# Altium PCB ePBR20_HVB_rev0.PcbDoc
Units mil, origin at the board's own origin, x right, y up, seen from the top; angles counter-clockwise.
Board outline 2520 x 5770 mil, 2 copper layers (Top Layer, Bottom Layer); 37 components, 30 nets, 107 pads, 104 vias.
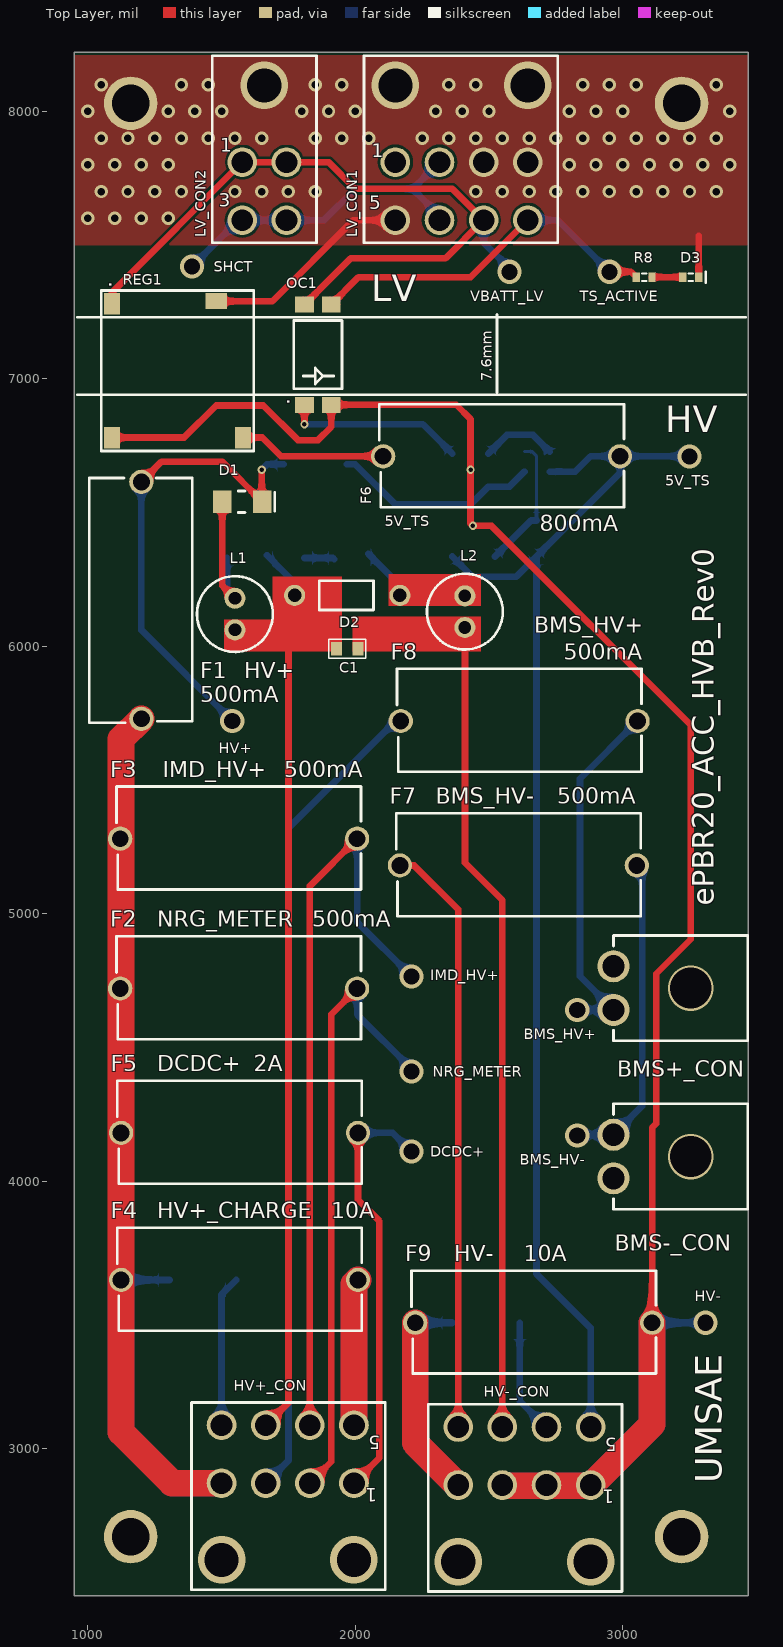
[diagram p0: Top Layer view]
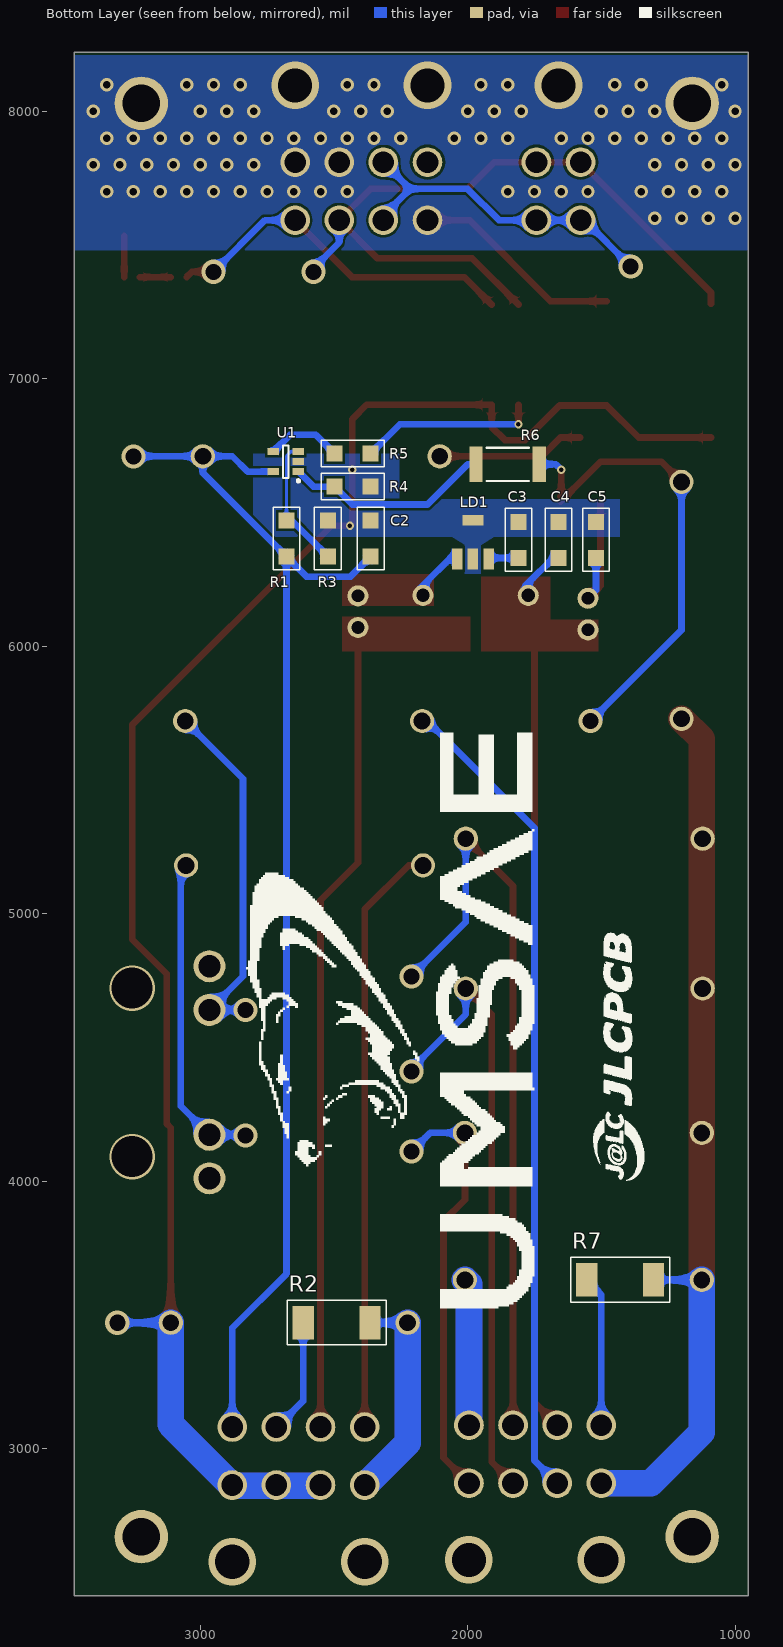
[diagram p1: Bottom Layer view, seen from below]
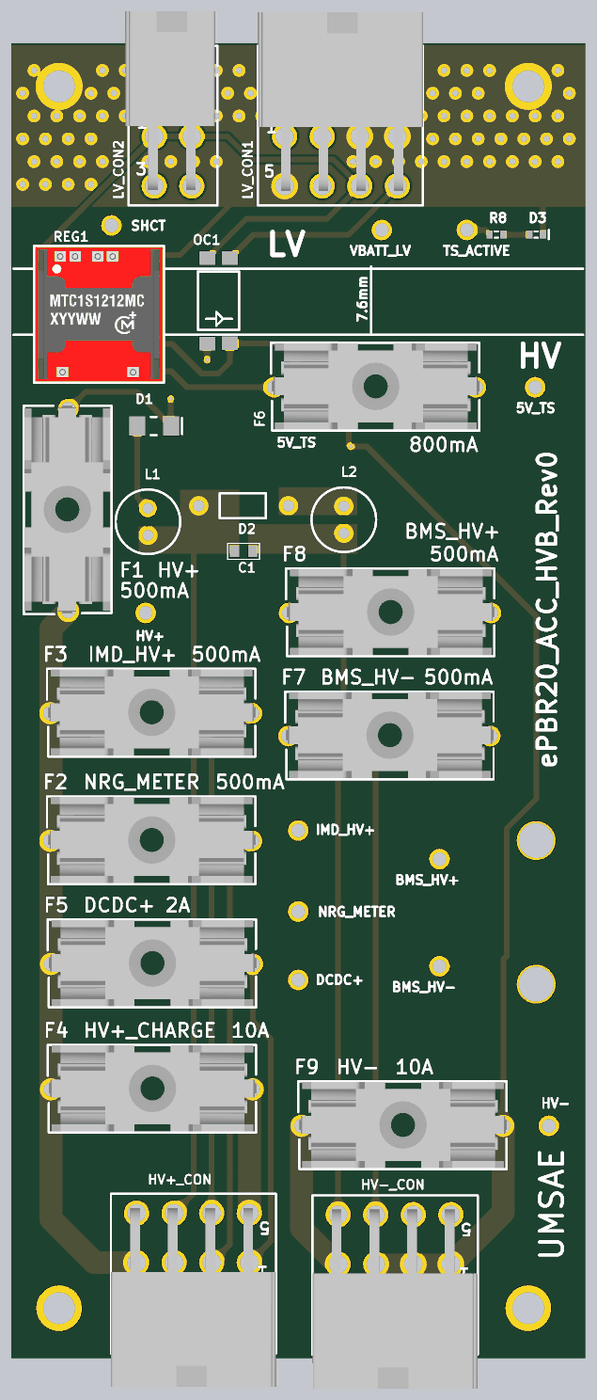
[diagram p2: 3D render of the assembled board from above, using the file's embedded part models]

## Layer stack, top to bottom
Top Solder: solder mask 0.4, Solder Resist, Dk 3.5
Top Layer: signal copper 1.4
Dielectric 1: dielectric 12.6, FR-4, Dk 4.8
Bottom Layer: signal copper 1.4
Bottom Solder: solder mask 0.4, Solder Resist, Dk 3.5

## Board outline
950,2450 3470,2450 3470,8220 950,8220

## Design rules (kind name [scope] priority, off if disabled: settings)
Clearance [All] p1: gap=10 ignorepadtopadclearanceinfootprint=FALSE
HoleSize [All] p1: absolutevalues=TRUE maxlimit=200 minlimit=15 maxpercent=80.000 minpercent=20.000
HoleToHoleClearance [All] p1: gap=8 allowstackedmicrovias=TRUE
MinimumAnnularRing MinimumAnnularRing_Pad [IsPad] p1: minimumring=7
MinimumAnnularRing MinimumAnnularRing_Via [IsVia] p2: minimumring=5
MinimumSolderMaskSliver [All] p1: minsoldermaskwidth=4
PlaneClearance [All] p1: clearance=15
PlaneConnect PlaneConnect_12V [InNet('12V')] p1: planeconnectstyle=Direct reliefexpansion=20 reliefentries=4 reliefconductorwidth=20 reliefairgap=10
PlaneConnect PlaneConnect_1 [All] p2: planeconnectstyle=Relief reliefexpansion=15 reliefentries=4 reliefconductorwidth=15 reliefairgap=10
PolygonConnect [All] p1: connectstyle=Direct reliefconductorwidth=15 reliefentries=4 polygonreliefangle="90 Angle" airgapwidth=10
RoutingVias [All] p1: holewidth=17 width=31 viastyle="Through Hole" minholewidth=15 minwidth=29 maxholewidth=50 maxwidth=100
SilkToSilkClearance [All] p1: silktosilkclearance=7
SilkToSolderMaskClearance [IsPad] p1: minsilkscreentomaskgap=2 clearancetoexposedcopper=TRUE
SolderMaskExpansion [All] p1: expansion=3
Width [All] p1: maxlimit=200 minlimit=7 preferedwidth=15
23 further rules are at their usual default settings.

## Classes and differential pairs
component class Connectors: BMS+_CON BMS-_CON HV+_CON HV+_CON1 HV-_CON HV-_CON1 LV_CON1 LV_CON2 SW1
component class "TSAL & HV Indicators": C1 C2 C3 C4 C5 Cdd1 Cin1 Cin2 Co1 D1 D2 D3 F6 L1 L2 LD1 Lin1 OC1 R1 R3 R4 R5 R6 R8 REG1 U1
component class Fuses: F1 F2 F3 F4 F5 F7 F8 F9 R2 R7

## Components (designator, comment, footprint, x,y, rotation, side; value= is the part's Value field where it differs from the comment)
BMS+_CON "1-770966-0" "TE  1-770966-0 2POS CONN" 3845.52,5015 r270 top
BMS-_CON "1-770966-0" "TE  1-770966-0 2POS CONN" 3845.52,4385 r270 top
C1 "10nF" 0805R-GENERIC 2000,5990 r180 top (schematic designator C5)
C2 "0.1uF" 1206R-GENERIC 2362.6,6470 r270 bottom (schematic designator C1)
C3 "0.1uF" 1206R-GENERIC 1810,6465 r270 bottom (schematic designator C6)
C4 "0.1uF" 1206R-GENERIC 1660,6465 r270 bottom
C5 "0.1uF" 1206R-GENERIC 1520,6330 r90 bottom (schematic designator C3)
D1 "SMBJ5366B-TP" DO-214AA 1577.5,6540 r0 top (schematic designator D2)
D2 "MUR160-TPMSCT-ND" DO-41 1970,6190 r180 top (schematic designator D3)
D3 "" J1-0603 3254.5,7380 r0 top
F1 "500mA" "FUSEHOLDER 5X20" 1200,6614.12 r270 top
F2 "500mA" "FUSEHOLDER 5X20" 2006.85,4720 r180 top (schematic designator F3)
F3 "500mA" "FUSEHOLDER 5X20" 2006.85,5280 r180 top (schematic designator F4)
F4 "10A" "FUSEHOLDER 5X20" 2010,3630 r180 top (schematic designator F5)
F5 "2A" "FUSEHOLDER 5X20" 2010,4180 r180 top (schematic designator F2)
F6 "750mA" "FUSEHOLDER 5X20" 2990,6710 r180 top (schematic designator F3)
F7 "500mA" "FUSEHOLDER 5X20" 3052.68,5180 r180 top (schematic designator F8)
F8 "500mA" "FUSEHOLDER 5X20" 3055.83,5720 r180 top (schematic designator F7)
F9 "10A" "FUSEHOLDER 5X20" 3110,3470 r180 top (schematic designator F6)
HV+_CON "Header 8" WM1354-ND 1582.5,3087 r0 top
HV-_CON "Header 8" WM1354-ND 2467.5,3080 r0 top
L1 "33mH" "Radial - 3mm" 1550,6120 r270 top (schematic designator L3)
L2 "33mH" "Radial - 3mm" 2410,6129.06 r270 top (schematic designator L1)
LD1 "HV9923N8-G" TO-243AA 1980,6400 r90 bottom
LV_CON1 "Header 8" WM1354-ND 2562.5,7593 r180 top
LV_CON2 "Header 4" WM1352-ND 1660,7593 r180 top
OC1 "VO615A-3X017T" Optocoupler 1860,7090 r90 top
R1 "11K" 1206R-GENERIC 2677.34,6335 r90 bottom (schematic designator R3)
R2 "352210KJT" 2512R-GENERIC 2490,3470 r0 bottom value=10K
R3 "1.5K" 1206R-GENERIC 2522.6,6470 r270 bottom (schematic designator R4)
R4 "1.1K" 1206R-GENERIC 2497.6,6596.62 r180 bottom (schematic designator R7)
R5 "100" 1206R-GENERIC 2497.6,6720 r180 bottom
R6 "100K" RESC2512(6432)_N 1850,6680 r180 bottom
R7 "352210KJT" 2512R-GENERIC 1430,3630 r0 bottom value=10K (schematic designator R1)
R8 "560" J1-0603 3080,7380 r180 top
REG1 "MTC1S1205MC" MTC1S1205MC 1090,7280 r270 top
U1 "MCP6561UT" SOT-23-OT5_N 2680,6690 r0 bottom

## Footprints (in the part's own frame and the unit in brackets; to place one, negate y for a bottom-side part, rotate by r counter-clockwise, add the part's x,y. Pads: shape width x height; smd on the part's side, far side on the other; paste and mask are expansions set on the pad)
0805R-GENERIC [mil] "RESISTOR 0805"
  rect 40x50 smd: 1(-10,0) 2(70,0)
  silkscreen extent -40,-35 100,35, body extent -11,-25 70,25, height 27
1206R-GENERIC [mil]
  rect 60x60 smd: 1(0,0) 2(135,0)
  silkscreen extent -50,-50 185,50
2512R-GENERIC [mil]
  rect 80x125 smd: 1(-125,0) 2(125,0)
  silkscreen extent -186,-84 185,83, body extent -139,-60 136,61, height 19
DO-41 [mm]
  round 2 hole 1.27: 1(-5,0) 2(5,0)
  silkscreen extent -2.5,-1.4 2.67,1.4, body extent -2.6,-1.35 2.6,1.35, height 2.69
DO-214AA [mil]
  rect 70x85 smd: 1(-74.8,0) 2(74.8,0)
  silkscreen extent -15,-40 122,40, body extent -94,-79 94,79, height 10
"FUSEHOLDER 5X20" [mm]
  round 2.3 hole 1.6: 1(0,0) 2(22.5,0)
  silkscreen extent -0.37,-4.95 22.86,4.83, body extent -0.37,-4.9 22.73,4.7, height 11.5
J1-0603 [mm] "Chip Resistor, Body 1.6x0.8mm, IPC High Density"
  rect 0.7x0.9 smd: 1(-0.75,0) 2(0.75,0)
  silkscreen extent -0.2,-0.35 0.2,0.35, body extent -0.85,-0.48 0.85,0.48, height 0.9
MTC1S1205MC [mil]
  rect 80x60 smd: 1(0,0) 2(500,0) 4(500,490)
  rect 60x80 smd: 6(-10,390)
  silkscreen extent -50,-40 550,530, body extent -45,-35 545,525, height 440
Optocoupler [mm]
  rect 1.52x1.78 smd: 1(-4.78,1.27) 2(-4.76,-1.27) 3(4.76,-1.27) 4(4.76,1.27)
  silkscreen extent -3.25,-2.29 3.25,2.29, body extent -3.3,-2.29 3.3,2.29, height 4.5
"Radial - 3mm" [mm]
  round 2 hole 1.2: 1(-1.5,0) 2(1.5,0)
  silkscreen extent -3.6,-3.6 3.6,3.6, body extent -3.6,-3.6 3.6,3.6, height 8.5
RESC2512(6432)_N [mm] "Chip Resistor, Body 6.4x3.2mm, IPC Medium Density"
  rect 1.25x3.35 smd: 1(-3,0) 2(3,0)
  silkscreen extent -2,-1.57 2,1.58, body extent -3.25,-1.7 3.25,1.7, height 0.75
SOT-23-OT5_N [mm] "SOT23, 5-Leads, Body 2.9x1.7mm, Pitch 0.95mm, Lead Span 2.8mm, IPC Medium Density"
  rect 1.1x0.65 smd: 1(-1.2,0.95) 2(-1.2,0) 3(-1.2,-0.95) 4(1.2,-0.95) 5(1.2,0.95)
  silkscreen extent -1.32,-1.55 0.25,1.95, body extent -0.9,-1.55 0.9,1.55, height 1.45
"TE  1-770966-0 2POS CONN" [mil] "CONN HEADER R/A 2POS 4.14MM"
  round 120 hole 83: 1(375,-880) 2(212.01,-880)
  silkscreen extent 97,-880 490,-378, body extent 102,-901 541,-322, height 306
TO-243AA [mm]
  rect 2x1 smd: 1(-1.9,1.5) 2(-1.9,0) 3(-1.9,-1.5)
  rect 1x2 smd: 4(1.8,0)
  body extent -1.3,-2.3 1.3,2.3, height 1.6
WM1352-ND [mil]
  round 111 hole 81: 1(82.5,-217) 2(-82.5,-217) 3(82.5,0) 4(-82.5,0)
  silkscreen extent -195,-615 195,85, body extent -184,-767 209,17, height 449
WM1354-ND [mil]
  round 111 hole 81: 1(412.5,-217) 2(247.5,-217) 3(82.5,-217) 4(-82.5,-217) 5(412.5,0) 6(247.5,0) 7(82.5,0) 8(-82.5,0)
  silkscreen extent -195,-615 530,85, body extent -195,-762 529,22, height 449

## Part data
BMS+_CON BMS-_CON: library part "Header 2", "Header, 2-Pin", LatestRevisionDate=17-Jul-2002, LatestRevisionNote="Re-released for DXP Platform.", Publisher="Altium Limited"
C1: library part Cap, "885342207014:  CAP CER 10000PF 500V X7R 0805", Supplier Part Number 1=732-12169-1-ND, LatestRevisionDate=17-Jul-2002, LatestRevisionNote="Re-released for DXP Platform.", PackageDescription="Radial Cap, Thru-Hole; 2 Leads; 0.3 in Pin Spacing", PackageReference=RAD-0.3, Published=8-Jun-2000, Publisher="Altium Limited", Supplier 1=Digi-Key
C2 C3 C4 C5: library part Cap, "CGA5L4X7T2W104M160AA: CAP CER 0.1UF 450V X7T 1206", Supplier Part Number 1=445-12959-1-ND, LatestRevisionDate=17-Jul-2002, LatestRevisionNote="Re-released for DXP Platform.", PackageDescription="Radial Cap, Thru-Hole; 2 Leads; 0.3 in Pin Spacing", PackageReference=RAD-0.3, Published=8-Jun-2000, Publisher="Altium Limited", Supplier 1=Digi-Key
D1: library part "D Zener", "DIODE ZENER 39V 5W DO214AA", Power=5W, Supplier Part Number 1=SMBJ5366B-TPMSCT-ND, Voltage=39V, LatestRevisionDate=17-Jul-2002, LatestRevisionNote="Re-released for DXP Platform.", PackageDescription="Diode, Thru-Hole; 2 Leads; 0.7 in Pin Spacing", PackageReference=DIODE-0.7, Published=8-Jun-2000, Publisher="Altium Limited", Supplier 1=Digi-Key
D2: library part "Diode 1N914", "DIODE GEN PURP 600V 1A DO41", Code_JEDEC=DO-204-AH, ComponentLink1Description="Manufacturer Link", ComponentLink1URL=http://www.fairchildsemi.com/, ComponentLink2Description=Datasheet, ComponentLink2URL=http://www.fairchildsemi.com/ds/1N%2F1N4448.pdf, DatasheetVersion=1997, LatestRevisionDate=17-Jul-2002, LatestRevisionNote="Re-released for DXP Platform.", PackageDescription="Diode, Axial; Body 3.8 x 1.9 mm (LxDia. max), Lead Dia. 0.53 mm (max)", PackageReference=DO-35, Published=8-Jun-2000, Publisher="Altium Limited", Supplier 1=Digi-Key, Supplier Part Number 1=MUR160-TPMSCT-ND
D3: library part LED2, "Typical RED, GREEN, YELLOW, AMBER GaAs LED", SupplierPartNo=475-2512-1-ND, LatestRevisionDate=17-Jul-2002, LatestRevisionNote="Re-released for DXP Platform.", PackageDescription="SM LED; 2 Flat Leads", PackageReference=3.2X1.6X1.1, PackageVersion=Feb-2002, Published=8-Jun-2000, Publisher="Altium Limited"
F1 F2 F3 F4 F5 F6 F7 F8 F9: library part "Fuse 2", "0031.8201: FUSE BLOK CARTRIDGE 500V 10A PCB", LatestRevisionDate=17-Jul-2002, LatestRevisionNote="Re-released for DXP Platform.", PackageDescription="Thru-Hole; 2 Leads", PackageReference=PIN-W2/E2.8, Published=8-Jun-2000, Publisher="Altium Limited"
  F6: Supplier 2=Digi-Key, Supplier Part Number 2=486-1258-ND
HV+_CON HV-_CON LV_CON1: "Header, 8-Pin", Supplier Part Number 1=WM1354-ND, LatestRevisionDate=17-Jul-2002, LatestRevisionNote="Re-released for DXP Platform.", Publisher="Altium Limited", Supplier 1=Digi-Key
L1 L2: library part "Inductor Iron", "22R336C: FIXED IND 33MH 36MA 118.8 OHM TH", Supplier Part Number 1=811-1294-ND, LatestRevisionDate=17-Jul-2002, LatestRevisionNote="Re-released for DXP Platform.", PackageDescription="Axial Device, Thru-Hole; 2 Leads; 0.9 in Pin Spacing", PackageReference=AXIAL-0.9, Published=24-Mar-1999, Publisher="Altium Limited", Supplier 1=Digi-Key
LD1: library part 1-776163-5, "IC LED Driver AC DC Offline Switcher Triac Dimming 30mA Lighting SOT-89-3", Supplier Part Number 1=HV9923N8-GCT-ND, ComponentLink1Description=Datasheet, ComponentLink1URL=http://ww1.microchip.com/downloads/en/DeviceDoc/20005311A.pdf, Supplier 1=Digi-Key
LV_CON2: "Header, 4-Pin", Supplier Part Number 1=WM1352-ND, LatestRevisionDate=17-Jul-2002, LatestRevisionNote="Re-released for DXP Platform.", Publisher="Altium Limited", Supplier 1=Digi-Key
OC1: library part Optoisolator1, "OPTOISOLATR 5KV TRANSISTOR 4-SMD", Supplier Part Number 1=VO615A-3X017TCT-ND, ComponentLink1Description=Datasheet, ComponentLink1URL=http://www.vishay.com/docs/81753/vo615a.pdf, DatasheetVersion=Nov-2003, LatestRevisionDate=04-Mar-2005, LatestRevisionNote="Sch pins 3 & 4 Swapped.", PackageReference=DIP-4, Published=24-Mar-1999, Publisher="Altium Limited", Supplier 1=Digi-Key
R1: library part Res1, "KTR18EZPF1102: RES SMD 11K OHM 1% 1/4W 1206", Supplier Part Number 1=RHM11KAICT-ND, LatestRevisionDate=17-Jul-2002, LatestRevisionNote="Re-released for DXP Platform.", PackageDescription="Axial Device, Thru-Hole; 2 Leads; 0.3 in Pin Spacing", PackageReference=AXIAL-0.3, Published=8-Jun-2000, Publisher="Altium Limited", Supplier 1=Digi-Key
R2 R7: library part Res3, "Resistor", LatestRevisionDate=29-May-2009, LatestRevisionNote="IPC-7351 Footprint Added.", PackageDescription="Chip Resistor", PackageReference=J1-0603, Published=8-Jun-2000, Publisher="Altium Limited"
R3: library part Res1, "KTR18EZPF1501: RES SMD 1.5K OHM 1% 1/4W 1206", Supplier Part Number 1=RHM1.50KAICT-ND, LatestRevisionDate=17-Jul-2002, LatestRevisionNote="Re-released for DXP Platform.", PackageDescription="Axial Device, Thru-Hole; 2 Leads; 0.3 in Pin Spacing", PackageReference=AXIAL-0.3, Published=8-Jun-2000, Publisher="Altium Limited", Supplier 1=Digi-Key
R4: library part Res1, "RT1210BRD071K1L: RES SMD 1.1K OHM 0.1% 1/4W 1210", Supplier Part Number 1=YAG2209CT-ND, LatestRevisionDate=17-Jul-2002, LatestRevisionNote="Re-released for DXP Platform.", PackageDescription="Axial Device, Thru-Hole; 2 Leads; 0.3 in Pin Spacing", PackageReference=AXIAL-0.3, Published=8-Jun-2000, Publisher="Altium Limited", Supplier 1=Digi-Key, Supplier 2=Digi-Key, Supplier Part Number 2=A116033TR-ND
R5 R8: library part Res1, "KTR18EZPJ101: RES SMD 100 OHM 5% 1/4W 1206", Supplier Part Number 1=RHM100PCT-ND, LatestRevisionDate=17-Jul-2002, LatestRevisionNote="Re-released for DXP Platform.", PackageDescription="Axial Device, Thru-Hole; 2 Leads; 0.3 in Pin Spacing", PackageReference=AXIAL-0.3, Published=8-Jun-2000, Publisher="Altium Limited", Supplier 1=Digi-Key
R6: library part CMP-1018-00122-1, "HVCB2512FKC100K: RES SMD 100K OHM 1% 2W 2512", Case-EIA=2512, Case-Metric=6432, Power=2W, Supplier Part Number 1=HVCB2512FKC100KCT-ND, Tolerance="5 %", Supplier 1=Digi-Key, Technology=SMT
REG1: SupplierPartNo=811-3078-1-ND
U1: library part CMP-0187-00428-2, "1.8V Low Power Push-Pull Output Comparator, 5-Pin SOT-23, Extended Temperature Range, Tape and Reel", Supplier Part Number 1=MCP6561UT-E/OTCT-ND, Code_IPC=SOT23-5, ComponentLink1Description="Manufacturer URL", ComponentLink1URL=http://www.microchip.com/, ComponentLink2Description=Datasheet, ComponentLink2URL=http://ww1.microchip.com/downloads/en/DeviceDoc/22139b.pdf, ComponentLink3Description="Package Specification", ComponentLink3URL=http://www.microchip.com/stellent/groups/techpub_sg/documents/packagingspec/en012702.pdf, DatasheetVersion="revB, Aug-2009", PackageDescription="5-Lead Plastic Small Outline Transistor (OT) [SOT-23]", PackageReference=SOT-23-OT5, PackageVersion="revBB, Aug-2009", RevisionNote="URLs added.", Supplier 1=Digi-Key, Supplier 2=Digi-Key, Supplier Part Number 2=MCP6561UT-E/OTDKR-ND

## Free pads (board coordinates)
  round 200 hole 140: MH(1160,2670) MH(1160,8030) MH(3220,2670) MH(3220,8030)

## Via types
v1: diameter 50, hole 28, Top Layer to Bottom Layer, 80 vias
v2: diameter 90, hole 60, Top Layer to Bottom Layer, 11 vias
v3: diameter 178, hole 128, Top Layer to Bottom Layer, 7 vias
v4: diameter 31, hole 17, Top Layer to Bottom Layer, 4 vias
v5: diameter 170, hole 154, Top Layer to Bottom Layer, 2 vias

## Nets (pads, with @x,y where several pads share a name; then routed paths per layer and width w, separated by ;. In a path a pad name is that pad's centre, name@x,y a point inside that pad or via, vN(x,y) a via of type N, cw(c..) or ccw(c..) an arc to the next point about the centre after c; other vN are vias at no path point)
0V_UNFUSED: F7.2 HV-_CON.8 | length 2221.5
  Top Layer w25: F7.2 2220,5180 2385,5015 HV-_CON.8
5V_TS: C2.2 F6.1 HV-_CON.5 R1.1 U1.5 | length 4769.9
  Bottom Layer w25: C2.2 2437.6,6260 2602.34,6260 R1.1 ; U1.5 2822.6,6652.6 2880,6710 F6.1 ; HV-_CON.5@2880,3077 HV-_CON.5 2880,3450 2677.34,3652.66 R1.1 ; v2(3250,6710) F6.1 ; R1.1 2990,6647.66 F6.1
300V_UNFUSED: F8.2 HV+_CON.3 | length 3065
  Bottom Layer w25: HV+_CON.3 1750,2955 1750,5320 F8.2@2160,5730
BMS_HV+: BMS+_CON.1 F8.1 | length 1356.9
  Bottom Layer w25: v2(2830,4640) BMS+_CON.1 2840,4765.52 2840,5504.17 F8.1
BMS_HV-: BMS-_CON.2 F7.1 | length 1188.2
  Bottom Layer w25: v2(2830,4170) 2832.99,4172.99 BMS-_CON.2 3072.68,4280.15 F7.1@3072.68,5180
DCDC+: F5.1 HV+_CON.1 | length 1611.5
  Top Layer w25: HV+_CON.1 2090,2965 2090,3850 2010,3930 F5.1
  Bottom Layer w25: F5.1 2140,4180 v2(2210,4110)
GND: D3.2 LV_CON1.3 LV_CON1.4 LV_CON1.5 pad.MH@1160,8030 pad.MH@3220,8030 REG1.6 | length 949.5
  Top Layer w25: REG1.6 1690,7290 1993,7593 LV_CON1.5 ; D3.2 3284.03,7534.03
  other v1: 1000,7600 1100,7600 1200,7600 1300,7600 1050,7700 1150,7700 1250,7700 1350,7700 1550,7700 1650,7700 1750,7700 1850,7700 2450,7700 2550,7700 2650,7700 2750,7700 2850,7700 2950,7700 3050,7700 3150,7700 3250,7700 3350,7700 1000,7800 1100,7800 1200,7800 1300,7800 2800,7800 2900,7800 3000,7800 3100,7800 3200,7800 3300,7800 3400,7800 1050,7900 1150,7900 1250,7900 1350,7900 1450,7900 1550,7900 1650,7900 1850,7900 1950,7900 2050,7900 2250,7900 2350,7900 2450,7900 2550,7900 2650,7900 2750,7900 2850,7900 2950,7900 3050,7900 3150,7900 3250,7900 3350,7900 1000,8000 1300,8000 1400,8000 1500,8000 1800,8000 1900,8000 2000,8000 2300,8000 2400,8000 2500,8000 2800,8000 2900,8000 3000,8000 3400,8000 1050,8100 1350,8100 1450,8100 1850,8100 1950,8100 2350,8100 2450,8100 2850,8100 2950,8100 3050,8100 3350,8100
  other v3: 1660,8097 2150,8097 2645,8097
HV+: F1.2 F2.2 F3.2 F4.2 F5.2 HV+_CON.4 R7.1 | length 4358.6
  Top Layer w100: F1.2 1124.17,5652.47 F5.2 F4.2 1124.17,3060.83 1315,2870 HV+_CON.4
  Bottom Layer w25: F4.2 R7.1
  Bottom Layer w100: F4.2 1124.17,3060.83 1315,2870 HV+_CON.4
HV+_CHARGE: F4.1 HV+_CON.5 | length 1098.4
  Top Layer w100: HV+_CON.5 1995,3615 F4.1
  Bottom Layer w100: HV+_CON.5 1995,3615 F4.1
HV+_FUSED: D1.2 F1.1 R6.2 | length 1771.9
  Top Layer w25: F1.1 1275.88,6690 1502.3,6690 D1.2 ; v4(1650,6660) 1650,6562.3 D1.2@1652.3,6560
  Bottom Layer w25: F1.1 1200,6060 v2(1540,5720) ; v4(1650,6660) 1670,6680 R6.2
HV-: F9.2 HV-_CON.4 R2.1 | length 1494.1
  Top Layer w100: F9.2 2224.17,3020.83 HV-_CON.4@2385,2860
  Bottom Layer w25: F9.2 R2.1
  Bottom Layer w100: F9.2 2224.17,3020.83 HV-_CON.4@2385,2860
HV-_FUSED: C2.1 C3.1 C4.1 C5.2 F9.1 HV-_CON.1 HV-_CON.2 HV-_CON.3 LD1.2 LD1.4 OC1.2 R3.1 R4.2 REG1.2 U1.2 | length 7661.1
  Top Layer w25: REG1.2 1360,6780 1480,6900 1655.86,6900 1785.36,6770.5 1860.5,6770.5 1910,6820 OC1.2 2377.4,6902.6 2430.98,6849.02 v4(2430.98,6660) 2430.98,6459.02 v4(2440,6450) 2510,6450 3254.5,5705.5 3254.5,4903.92 3125.5,4774.93 3125.5,4214.5 3110,4198.99 F9.1
  Top Layer w100: HV-_CON.3@2550,2860 2880,2860 3110,3090 F9.1
  Bottom Layer w25: F9.1 v2(3310,3470)
  Bottom Layer w100: HV-_CON.3@2550,2860 2880,2860 3110,3090 F9.1
HV_IND_LED+: C1.2 C4.2 D2.2 HV+_CON.7 L1.2 | length 3494.1
  Top Layer w25: L1.2@1560,6080.94 1869.06,6080.94 ; HV+_CON.7 1750,3172 1750,6060
  Bottom Layer w25: C4.2@1670,6340 1783.15,6226.85 D2.2@1783.15,6210
HV_IND_LED-: C1.1 HV-_CON.7 L2.2 | length 3048
  Top Layer w25: L2.2 2410,5190 2550,5050 HV-_CON.7
IMD_HV+: F3.1 HV+_CON.6 | length 2864.9
  Top Layer w25: HV+_CON.6 1830,5103.15 F3.1
  Bottom Layer w25: F3.1 2006.85,4968.67 v2(2210,4765.52)
NetC3_2: C3.2 LD1.3 | length 112.9
  Bottom Layer w25: C3.2 1916.14,6330 LD1.3
NetC5_1: C5.1 D1.1 L1.1 | length 543.9
  Top Layer w25: D1.1 1502.7,6226.36 L1.1
  Bottom Layer w25: C5.1 1520,6209.06 L1.1
NetD2_1: D2.1 L2.1 LD1.1 | length 190.8
  Bottom Layer w25: LD1.1@2049.06,6345.2 2176.85,6217.4 D2.1@2176.85,6210 ; L2.1@2418.11,6210 L2.1@2420,6208.11
NetD3_1: D3.1 R8.1 | length 115.4
  Top Layer w25: R8.1 D3.1
NetF6_2: F6.2 REG1.4 | length 567.3
  Top Layer w25: REG1.4 1652.3,6780 1722.3,6710 F6.2 F6.2@2094.17,6720
NetOC1_1: OC1.1 R5.2 | length 670
  Top Layer w25: v4(1810,6830) OC1.1
  Bottom Layer w25: v4(1810,6830) 2252.6,6830 R5.2
NetR1_2: R1.2 R3.2 U1.3 | length 503.3
  Bottom Layer w12: U1.3 2661.42,6727.4 2677.34,6711.48 R1.2
  Bottom Layer w25: R3.2 2657.6,6470 R1.2
NetR4_1: R4.1 R6.1 U1.1 | length 777.6
  Bottom Layer w25: R6.1 2000,6680 2150,6530 2430.98,6530 R4.1 2576.78,6596.62 U1.1
NetR5_1: R5.1 U1.4 | length 284.6
  Bottom Layer w25: R5.1 2567.6,6790 2664.65,6790 U1.4
NRG_METER: F2.1 HV+_CON.2 | length 2317.4
  Top Layer w25: HV+_CON.2 1910,2950 1910,4623.15 F2.1
  Bottom Layer w25: F2.1 2006.85,4623.15 2210,4420 v2(2210,4410)
SHCT: LV_CON1.2 LV_CON1.6 LV_CON2.3 LV_CON2.4 | length 1245
  Bottom Layer w25: v2(1390,7420) 1563,7593 LV_CON2.3 LV_CON2.4 1883,7593 2000,7710 2215,7710 ; LV_CON1.6 2315,7610 2215,7710 ; LV_CON1.2 2215,7710
TS_ACTIVE: LV_CON1.8 OC1.3 R8.2 | length 1359.4
  Top Layer w25: OC1.3 2012.6,7380 2432,7380 LV_CON1.8 ; v2(2950,7400) 3030.47,7400 R8.2
  Bottom Layer w25: LV_CON1.8 2757,7593 v2(2950,7400)
TSMP_HV+: HV+_CON.8 R7.2 | length 565.8
  Bottom Layer w25: HV+_CON.8 1500,3575 R7.2
TSMP_HV-: HV-_CON.6 R2.2 | length 434.4
  Bottom Layer w25: R2.2 2615,3177 HV-_CON.6@2715,3077
VBATT_LV: LV_CON1.7 LV_CON2.1 LV_CON2.2 OC1.4 REG1.1 | length 2776.8
  Top Layer w25: REG1.1 1090,7322.5 LV_CON2.1 LV_CON2.2 1900,7810 2000,7710 2363,7710 LV_CON1.7 2337,7450 1982.6,7450 OC1.4
  Bottom Layer w25: LV_CON1.7 2480,7510 2590,7400 v2(2576.78,7400)
pads on no net: BMS+_CON.2 BMS-_CON.1 LV_CON1.1
copper on no net:
  other v3: 2385,2576 2880,2576 1500,2583 1995,2583
  other v5: 3254.5,4091.5 3254.5,4721.5

## Polygon pours and split planes (outlines as drawn)
GND on Top Layer "Top Layer-GND" (solid, pour order 4): 950,8210 3470,8210 3470,7500 950,7500
no net on Top Layer "Top Layer-No Net" (solid, pour order 6): 630,8210
HV-_FUSED on Bottom Layer "Bottom Layer-HV-_FUSED" (solid, pour order 14): 2801.14,6410 2801.14,6720 2256.4,6720 2256.4,6550 1431.14,6550 1431.14,6410 1899.5,6410 1950,6376.88 1950,6270 2010,6270 2010,6380 2060,6410
no net on Bottom Layer "Bottom Layer-No Net" (solid, pour order 10): 2010,6910
GND on Bottom Layer "Bottom Layer-GND" (solid, pour order 8): 950,8210 950,7480 3470,7480 3470,8210

## Other copper
Top Layer:
  rectangle net HV_IND_LED+: 1690,6090 1950,6260
  rectangle net HV_IND_LED+: 1510,5980 1950,6100
  rectangle net NetD2_1: 2125,6150 2470,6270
  rectangle net HV_IND_LED-: 1990,5980 2470,6110

## Silkscreen, mask and mechanical layers (free items; w line width, h text height)
Top Overlay:
  lines w10: 960,6940 3460,6940 ; 960,7230 3460,7230 ; 2530,6950 2530,7240 ; 3310,7360 3310,7400
  text "SHCT" at 1470,7400 h40
  text "LV" at 2060,7290 h100
  text "VBATT_LV" at 2430,7290 h40
  text "TS_ACTIVE" at 2840,7290 h40
  text "7.6mm" at 2510,6990 h40 r90
  text "HV" at 3160,6800 h100
  text "5V_TS" at 3160,6600 h40
  text "5V_TS" at 2110,6449.02 h40
  text "800mA" at 2690,6430 h60
  text "BMS_HV+" at 2670,6050 h60
  text "500mA" at 2780,5950 h60
  text "HV+" at 1585,5880 h60
  text "500mA" at 1420,5790 h60
  text "HV+" at 1490,5600 h40
  text "IMD_HV+" at 1280,5510 h60
  text "500mA" at 1735,5510 h60
  text "BMS_HV-" at 2300,5410 h60
  text "500mA" at 2755,5410 h60
  text "ePBR20_ACC_HVB_Rev0" at 3340,5030 h80 r90
  text "NRG_METER" at 1260,4950 h60
  text "500mA" at 1840,4950 h60
  text "IMD_HV+" at 2280,4750 h40
  text "BMS_HV+" at 2630,4530 h40
  text "DCDC+" at 1260,4410 h60
  text "2A" at 1620,4410 h60
  text "NRG_METER" at 2290,4390 h40
  text "DCDC+" at 2280,4091.5 h40
  text "BMS_HV-" at 2615,4060 h40
  text "HV+_CHARGE" at 1260,3860 h60
  text "10A" at 1910,3860 h60
  text "HV-" at 2370,3700 h60
  text "10A" at 2630,3700 h60
  text "HV-" at 3270,3550 h40
  text "UMSAE" at 3370,2870 h100 r90
Bottom Overlay:
  drawing of 38 lines, arcs and shapes, not listed
Board Outline:
  lines w10: 960,2460 3460,2460 3460,8210 960,8210 960,2460

## Text inside footprints (layer, text, board x,y; h text height)
HV+_CON: Top Overlay "5" at 2092.5,3047 h50 r180; Top Overlay "1" at 2082.5,2852 h50 r180
HV-_CON: Top Overlay "5" at 2977.5,3040 h50 r180; Top Overlay "1" at 2967.5,2845 h50 r180
LV_CON1: Top Overlay "1" at 2062.5,7828 h50; Top Overlay "5" at 2052.5,7633 h50
LV_CON2: Top Overlay "1" at 1495,7848 h50; Top Overlay "3" at 1490,7643 h50